# EAGLE board graphic_panel (EAGLE 7.7.0)
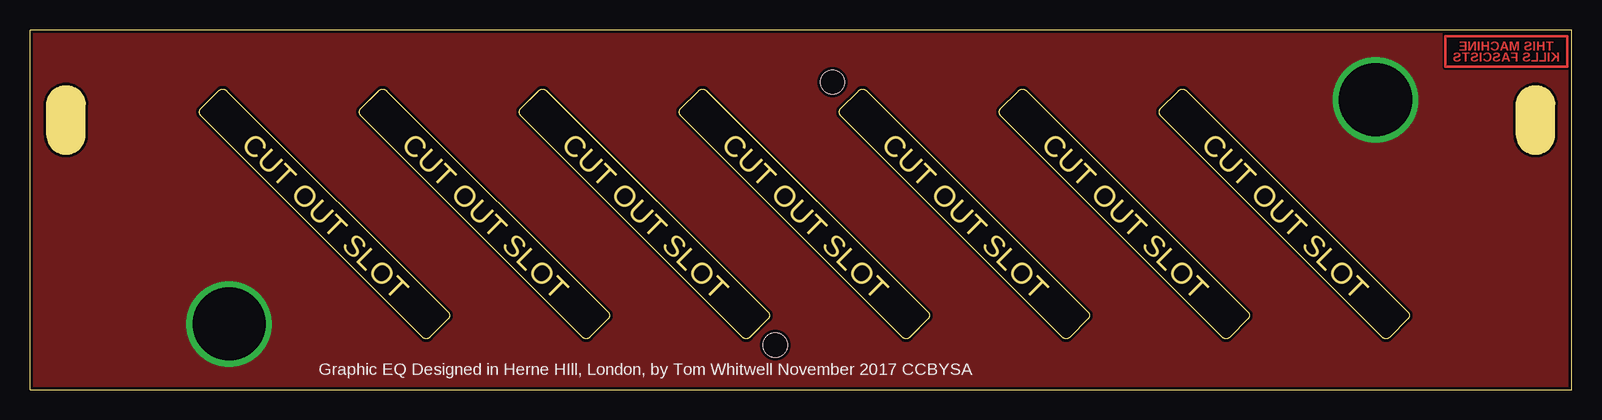
[diagram p0: board, top side]
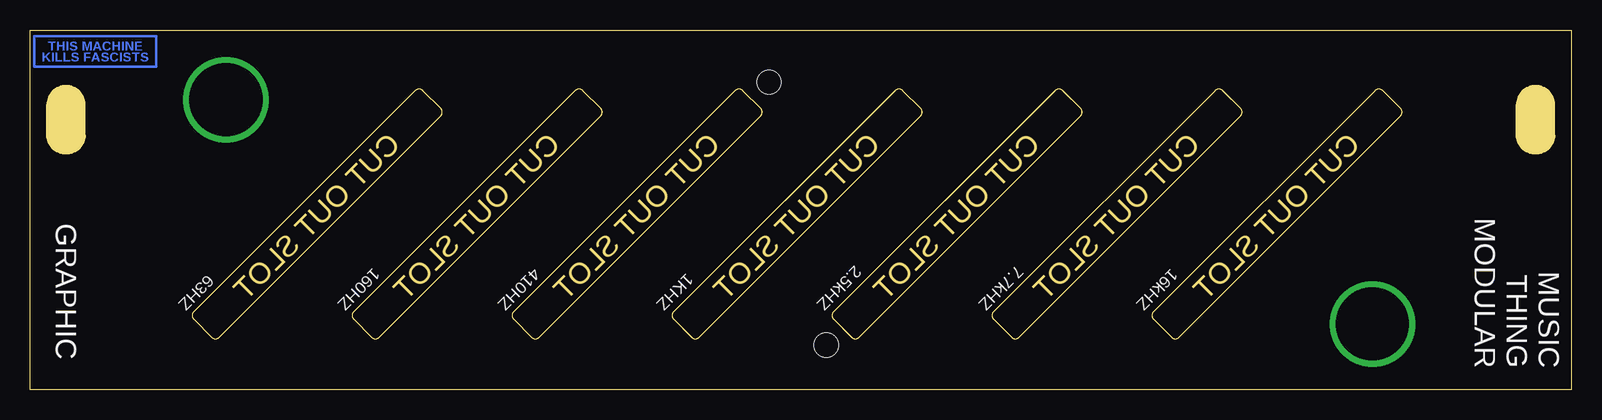
[diagram p1: board, bottom side, seen from below]

Size 128.5 x 30 mm. Coordinates in mm from the lower left corner, seen from the top.
Outline: 0,0 128.5,0 128.5,30 0,30 0,0
Copper layers (1*16): Top 0.035mm / dielectric 0.2mm / Bottom 0.035mm
Design rules "SeeedStudio_DRU_no_angle_20130527 *": minimum track width 6mil, minimum drill 12mil, track to track 6mil, track to pad 6mil, pad to pad 6mil, via to via 6mil, smd to smd 0mil, copper to edge 10mil, drill to drill 10mil, minimum pad ring 6mil, minimum via ring 6mil, stop-mask expansion 2mil, vias tented up to drill 25mil, thermal gap 10mil
Net classes: 0 default: width 0.203 mm; 1 power: width 0.406 mm
Holes 2 mm at 66.9,25.65 62.13,3.71

## Placement (x,y rotation side)
E$1  [20MM_SLOT]  24.55,14.66 315 top
E$2  [20MM_SLOT]  64.55,14.66 315 top
E$3  [20MM_SLOT]  77.89,14.66 315 top
E$4  [20MM_SLOT]  91.22,14.66 315 top
E$5  [20MM_SLOT]  104.56,14.66 315 top
E$6  [20MM_SLOT]  37.88,14.66 315 top
E$7  [20MM_SLOT]  51.22,14.66 315 top
U$1  [SLOT_HOLE]  3,22.5 90 top
U$2  [SLOT_HOLE]  125.5,22.5 90 top
U$3  [TMKF]  123.06,28.19 0 bottom

## Library data of the parts
E$1-E$7 U$1-U$3 = MusicThingModular

## Tracks (layer width: path | path; a pad name or v marks a point on that pad's centre or on a via)
GND  (via drill 6.1)
  other vias: 16.6,5.47 112.16,24.18
  pour Top: -0.43,30.43 129.24,30.43 129.24,-0.71 -0.46,-0.71 -0.46,30.43

## Text on the board
tPlace: Graphic EQ Designed in Herne HIll, London, by Tom Whitwell November 2017 CCBYSA
bPlace: 16kHZ | 7.7kHZ | 2.5kHZ | 1KHZ | 410HZ | 160HZ | 63HZ | MUSIC / THING / MODULAR | GRAPHIC